# Altium PCB PCB1.PcbDoc
Units mm, origin at the board's own origin, x right, y up, seen from the top; angles counter-clockwise.
Board outline 44.25 x 65.25 mm, 2 copper layers (Top Layer, Bottom Layer), stack 1.671 mm thick; 37 components, 36 nets, 125 pads, 6 vias.
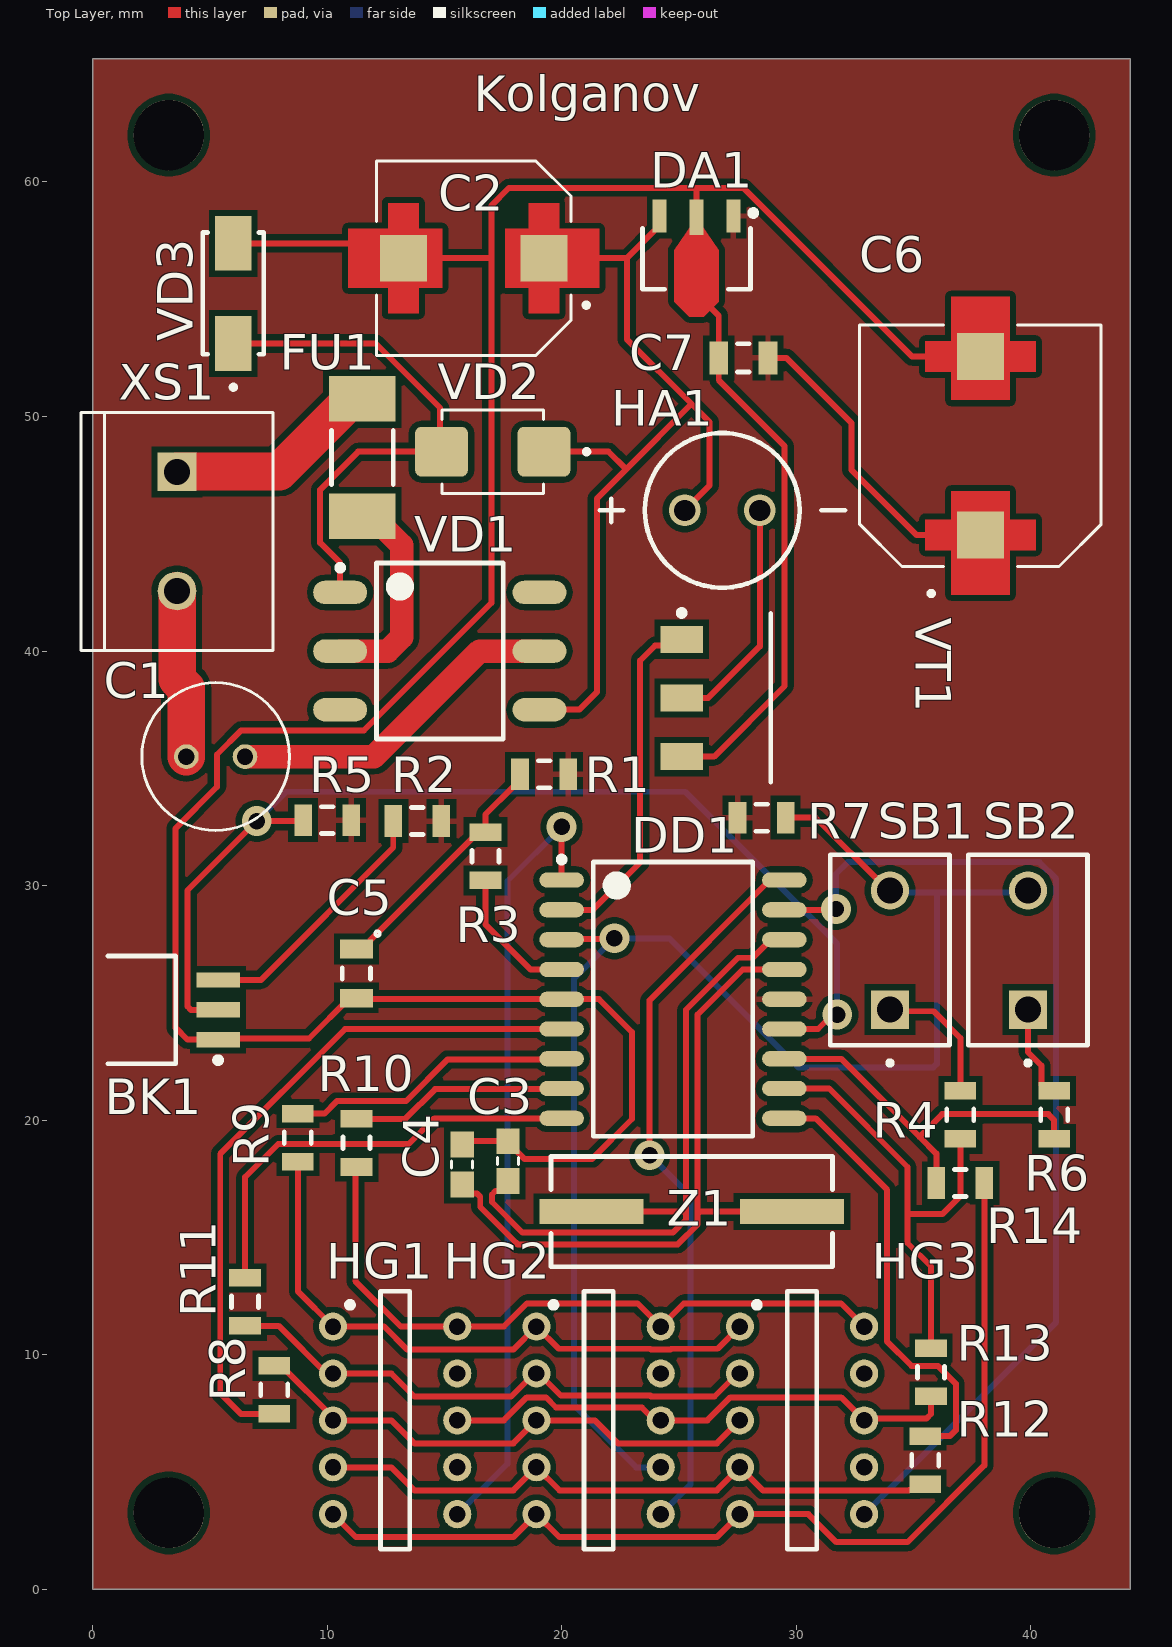
[diagram p0: Top Layer view]
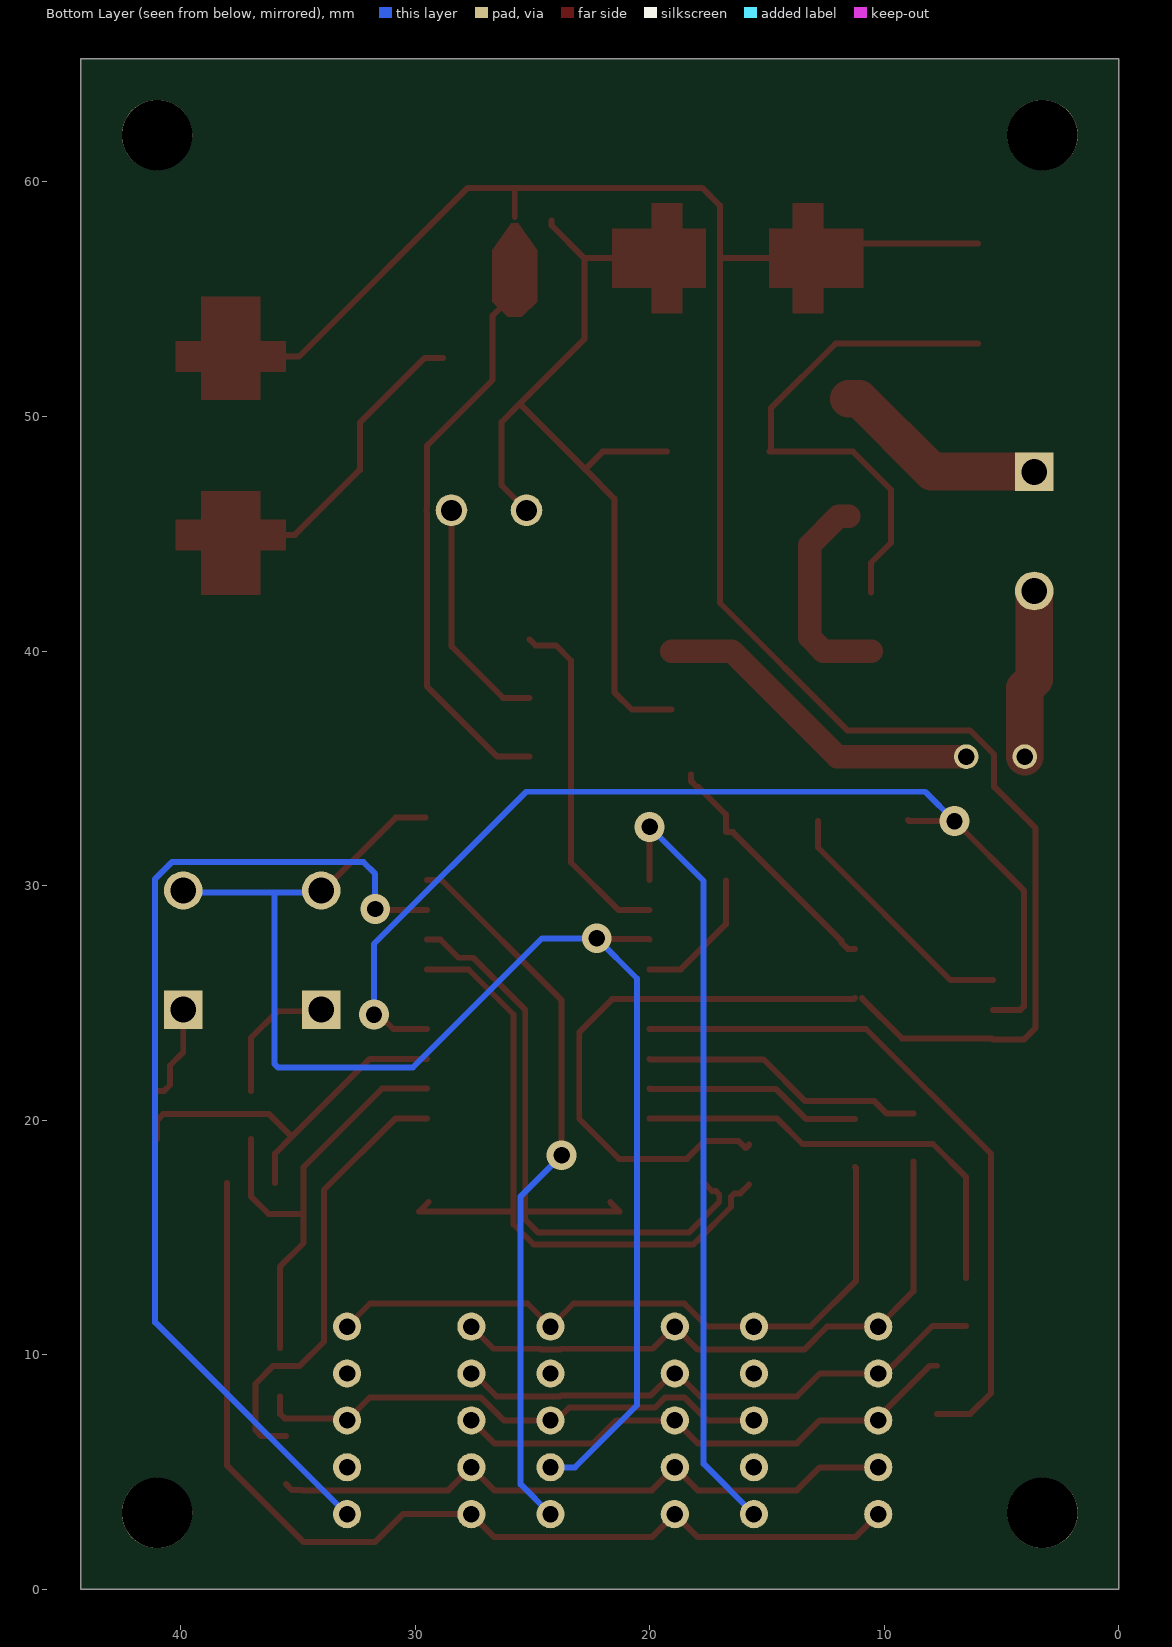
[diagram p1: Bottom Layer view, seen from below]
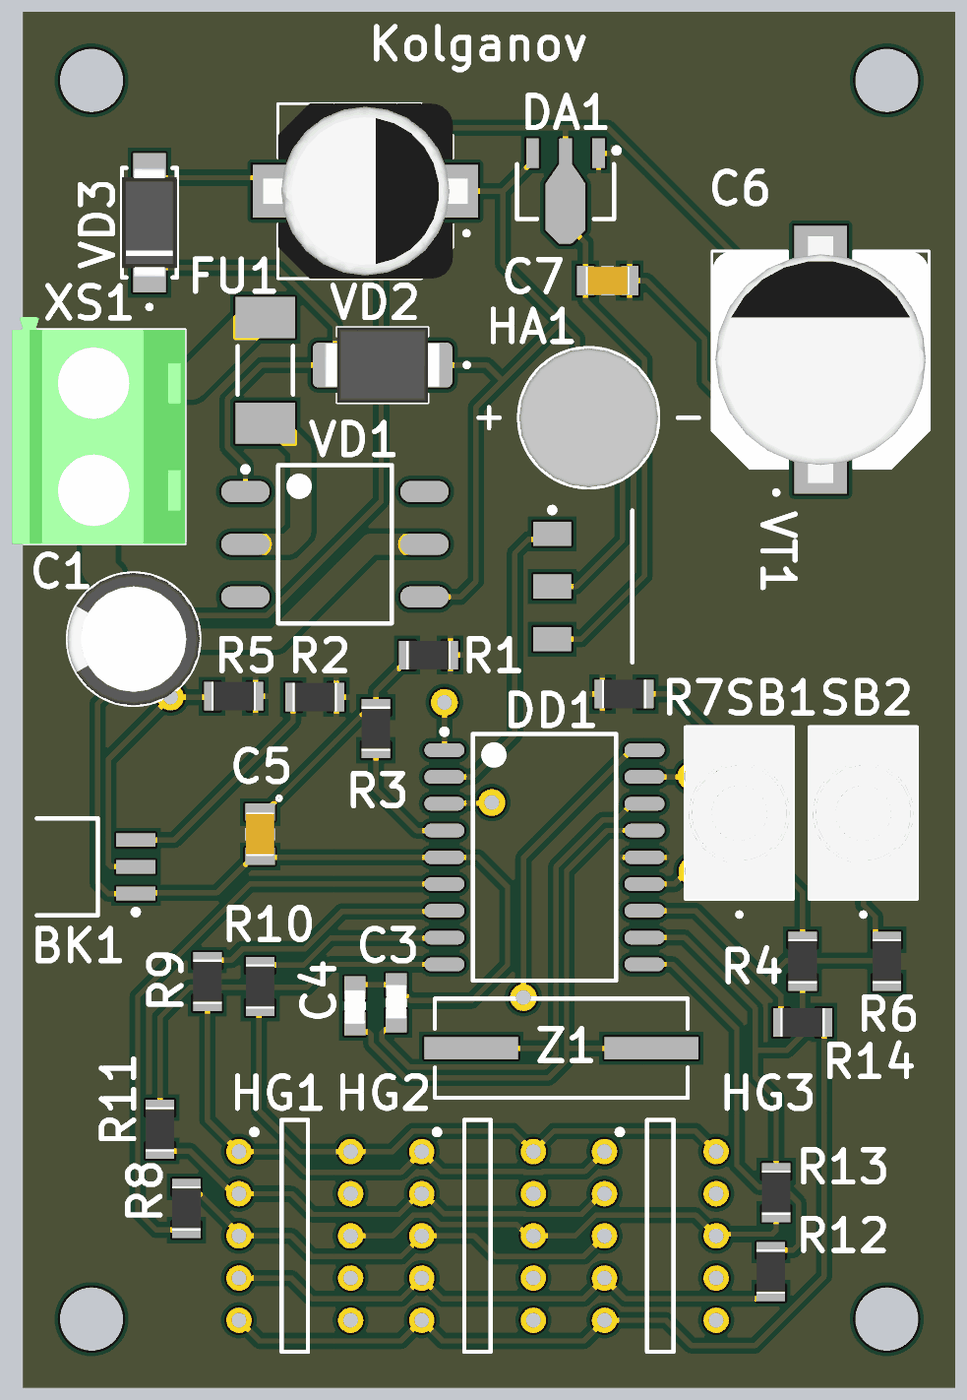
[diagram p2: 3D render of the assembled board from above, using the file's embedded part models]

## Layer stack, top to bottom
Top Solder: solder mask 0.0102, Solder Resist, Dk 3.5
Top Layer: signal copper 0.0356
Dielectric 1: dielectric 1.6, FR-4, Dk 4.8
Bottom Layer: signal copper 0.0356
Bottom Solder: solder mask 0.0102, Solder Resist, Dk 3.5

## Board outline
0,0 0,65.25 44.25,65.25 44.25,0

## Design rules (kind name [scope] priority, off if disabled: settings)
Clearance [All] p1: gap=0.254 ignorepadtopadclearanceinfootprint=FALSE except(0: Arc-Hole Track-Hole SMDPad-Hole THPad-Hole Via-Hole Fill-Hole Poly-Hole Region-Hole Text-Hole; 0.25: Arc-Arc Arc-Track Track-Track)
DiffPairsRouting DiffPair_DiffPairsRouting [InDifferentialPair ('OSC')] p1: maxlimit=0.254 minlimit=0.25 mostfreqgap=0.25 toplayer_minwidth=0.25 toplayer_maxwidth=0.381 toplayer_prefwidth=0.25 bottomlayer_minwidth=0.25 bottomlayer_maxwidth=0.381 bottomlayer_prefwidth=0.25 maxuncoupledlength=12.7
DiffPairsRouting [All] p2: maxlimit=0.254 minlimit=0.254 mostfreqgap=0.254 toplayer_minwidth=0.381 toplayer_maxwidth=0.381 toplayer_prefwidth=0.381 bottomlayer_minwidth=0.381 bottomlayer_maxwidth=0.381 bottomlayer_prefwidth=0.381 maxuncoupledlength=12.7
MatchedLengths DiffPair_MatchedLengths [InDifferentialPair ('OSC')] p1: tolerance=2.5 checknetsindiffpair=FALSE checkdiffpairvsdiffpair=TRUE checkxsignals=TRUE checkothers=TRUE
PolygonConnect [All] p1: connectstyle=Relief reliefconductorwidth=0.254 reliefentries=4 polygonreliefangle="90 Angle" airgapwidth=0.254
RoutingVias [All] p1: holewidth=0.7 width=1.27 viastyle="Through Hole" minholewidth=0.7 minwidth=1.27 maxholewidth=0.7 maxwidth=1.27
SolderMaskExpansion [All] p1: expansion=0.102 istentingtop=FALSE
Width [All] p1: maxlimit=1.6 minlimit=0.25 preferedwidth=0.25 minimp=50.000000 maximp=50.000000 favimp=50.000000
29 further rules are at their usual default settings.

## Classes and differential pairs
differential pair OSC: +OSC_P -OSC_N

## Components (designator, comment, footprint, x,y, rotation, side; value= is the part's Value field where it differs from the comment)
BK1 "DS18B20" "ds18b20 (Temperature)" 2.6,24.7 r180 top
C1 "CapacitorBI" "c1 1uF 400v" 5.25,35.5 r180 top
C2 "CapcatiorPOL" "c2 CAP ALUM 470UF 20% 25V SMD" 16.25,56.75 r180 top
C3 "CapacitorBI" "c3 c4 CAPC1608X90" 17.712,18.25 r90 top
C4 "CapacitorBI" "c3 c4 CAPC1608X90" 15.754,18.105 r270 top
C5 "CapcatiorPOL" "Polar CAPACITOR" 11.25,26.25 r270 top
C6 "CapcatiorPOL" "c6 CAP ALUM 1000UF 20% 16V SMD" 37.858,48.754 r90 top
C7 "CapacitorBI" CAPACITOR 27.75,52.5 r180 top
DA1 "78L05" 78lo5 25.75,56.75 r270 top
DD1 "PIC16F84A" PIC16F84A 24.75,25.154 r0 top
FU1 "Fuse box" "SMD06025C2 (Плавкий предохранитель)" 11.5,48.25 r270 top
HA1 "KCG0603-K" "KCG0603-K Пищалка" 26.849,46 r0 top
HG1 "LSD3C52-20" "LSD3C52-20 (7 segment)" 12.9,7.196 r0 top
HG2 "LSD3C52-20" "LSD3C52-20 (7 segment)" 21.575,7.196 r0 top
HG3 "LSD3C52-20" "LSD3C52-20 (7 segment)" 30.25,7.196 r0 top
R1 "resistor" "RES 0805" 19.25,34.746 r0 top
R2 "resistor" "RES 0805" 13.846,32.75 r180 top
R3 "resistor" "RES 0805" 16.75,31.25 r90 top
R4 "resistor" "RES 0805" 37,20.221 r270 top
R5 "resistor" "RES 0805" 10,32.792 r180 top
R6 "resistor" "RES 0805" 41,20.221 r270 top
R7 "resistor" "RES 0805" 28.525,32.896 r0 top
R8 "resistor" "RES 0805" 7.75,8.5 r270 top
R9 "resistor" "RES 0805" 8.75,19.25 r90 top
R10 "resistor" "RES 0805" 11.25,19.025 r90 top
R11 "resistor" "RES 0805" 6.5,12.25 r90 top
R12 "resistor" "RES 0805" 35.5,5.5 r90 top
R13 "resistor" "RES 0805" 35.75,9.25 r90 top
R14 "resistor" "RES 0805" 37,17.316 r180 top
SB1 "Button" "SW_800AWSP9M2QE (button)" 34,27.25 r90 top
SB2 "Button" "SW_800AWSP9M2QE (button)" 39.884,27.25 r90 top
VD1 "diode bridge" "КЦ407А (Диодный мост)" 14.806,40 r0 top
VD2 "Stabilitron" "Стабилитрон DIOM5436X247N" 17.064,48.5 r180 top
VD3 "Diod" "Диод US1A-13-F" 6,55.25 r90 top
VT1 "transistor" КТ315Б 29.369,38 r0 top
XS1 "Power" "Питание TE_282837-2" 3.6,45.1 r270 top
Z1 "kwarz" "Кварц  hc-49sm" 25.55,16.1 r0 top

## Footprints (in the part's own frame and the unit in brackets; to place one, negate y for a bottom-side part, rotate by r counter-clockwise, add the part's x,y. Pads: shape width x height; smd on the part's side, far side on the other; paste and mask are expansions set on the pad)
78lo5 [mm] "SOT89, 3-Leads, Body 4,50x2,45mm, Pitch 1,57mm, Lead Span 4,1mm, IPC Medium Density"
  rect 1.4x0.6 smd: 1(-1.8,1.57) 3(-1.8,-1.57)
  rect 1.5x0.6 smd: 2(-1.75,0)
  Top Layer region: -1.5,0.154 -0.35,0.95 1.85,0.95 2.5,0.3 2.5,-0.3 1.85,-0.95 -0.35,-0.95 -1.5,-0.154
  silkscreen extent -2.05,-2.3 1.32,2.55, body extent -1.28,-2.3 1.32,2.3, height 1.6
"c1 1uF 400v" [mm] "ECAP (К50-35), 1мкФ, 400В, 105°C, 20%, 6x12мм"
  round 1.05 hole 0.7: 1(1.25,0) 2(-1.25,0)
  silkscreen extent -3.15,-3.15 3.15,3.15, body extent -3.14,-3.14 3.15,3.14, height 12.51
"c2 CAP ALUM 470UF 20% 25V SMD" [mm]
  rect 2x2 smd paste-2 mask+0: 1(-3,0) 2(3,0)
  Top Layer region: 3.65,1.25 5.35,1.25 5.35,-1.25 3.65,-1.25 3.65,-2.35 2.35,-2.35 2.35,-1.25 1.35,-1.25 1.35,1.25 2.35,1.25 2.35,2.35 3.65,2.35
  Top Layer region: -2.35,1.25 -1.35,1.25 -1.35,-1.25 -2.35,-1.25 -2.35,-2.35 -3.65,-2.35 -3.65,-1.25 -5.35,-1.25 -5.35,1.25 -3.65,1.25 -3.65,2.35 -2.35,2.35
  silkscreen extent -4.9,-4.15 4.15,4.15, body extent -4.85,-4.15 4.85,4.15, height 10.5
"c3 c4 CAPC1608X90" [mm] "22 µF Molded Tantalum Capacitors 5 V 0603 (1608 Metric) 7.5Ohm"
  rect 1.1x1 smd: 1(-0.85,0) 2(0.85,0)
  silkscreen extent -0.15,-0.45 0.15,0.45, body extent -0.75,-0.5 0.85,0.5, height 0.85
"c6 CAP ALUM 1000UF 20% 16V SMD" [mm]
  rect 2x2 smd paste-2 mask+0: 1(-3.8,0) 2(3.8,0)
  Top Layer region: -3.15,1.25 -1.95,1.25 -1.95,-1.25 -3.15,-1.25 -3.15,-2.35 -4.45,-2.35 -4.45,-1.25 -6.35,-1.25 -6.35,1.25 -4.45,1.25 -4.45,2.35 -3.15,2.35
  Top Layer region: 4.45,1.25 6.35,1.25 6.35,-1.25 4.45,-1.25 4.45,-2.35 3.15,-2.35 3.15,-1.25 1.95,-1.25 1.95,1.25 3.15,1.25 3.15,2.35 4.45,2.35
  silkscreen extent -6.4,-5.15 5.15,5.15, body extent -5.85,-5.15 5.85,5.15, height 10.51
CAPACITOR [mm] "Chip Capacitor, 2-Leads, Body 2,00x1,25mm, IPC Medium Density"
  rect 0.8x1.4 smd: 1(-1.05,0) 2(1.05,0)
  silkscreen extent -0.25,-0.6 0.25,0.6, body extent -1.05,-0.67 1.05,0.67, height 0.45
"ds18b20 (Temperature)" [mm]
  rect 1.85x0.65 smd: 1(-2.75,1.27) 2(-2.75,0) 3(-2.75,-1.27)
  silkscreen extent -2.87,-2.3 1.95,2.3, body extent -0.95,-2.3 3.63,2.3, height 3.68
"KCG0603-K Пищалка" [mm]
  round 1.35 hole 0.9: 1(-1.6,0) 2(1.6,0)
  silkscreen extent -5.23,-3.3 5.23,3.3, body extent -3.3,-3.3 3.3,3.3, height 3.41
"LSD3C52-20 (7 segment)" [mm]
  round 1.2 hole 0.7: 1(-2.65,4) 2(-2.65,2) 3(-2.65,0) 4(-2.65,-2) 5(-2.65,-4) 6(2.65,-4) 7(2.65,-2) 8(2.65,0) 9(2.65,2) 10(2.65,4)
  silkscreen extent -2.05,-5.5 0.63,5.5, body extent -3.5,-5.5 3.5,5.5, height 6
PIC16F84A [mm] "SOIC, 18-Leads, Body 11,53x7,49mm, Pitch 1,27mm, IPC Medium Density"
  oval 1.9x0.65 smd: 1(-4.75,5.08) 2(-4.75,3.81) 3(-4.75,2.54) 4(-4.75,1.27) 5(-4.75,0) 6(-4.75,-1.27) 7(-4.75,-2.54) 8(-4.75,-3.81) 9(-4.75,-5.08) 10(4.75,-5.08) 11(4.75,-3.81) 12(4.75,-2.54) 13(4.75,-1.27) 14(4.75,0) 15(4.75,1.27) 16(4.75,2.54) 17(4.75,3.81) 18(4.75,5.08)
  silkscreen extent -4.87,-5.85 3.4,6.08, body extent -3.8,-5.85 3.8,5.85, height 2.64
"Polar CAPACITOR" [mm] "Chip Capacitor, 2-Leads, Body 2,00x1,25mm, IPC Medium Density"
  rect 0.8x1.4 smd: 1(-1.05,0) 2(1.05,0)
  silkscreen extent -1.8,-0.6 0.25,1, body extent -1.05,-0.67 1.05,0.67, height 0.45
"RES 0805" [mm] "Chip Resistor, 2-Leads, Body 2,00x1,25mm, IPC Medium Density"
  rect 0.75x1.35 smd: 1(-1.025,0) 2(1.025,0)
  silkscreen extent -0.25,-0.58 0.25,0.58, body extent -1.05,-0.67 1.05,0.67, height 0.45
"SMD06025C2 (Плавкий предохранитель)" [mm]
  rect 1.95x2.83 smd: 1(-2.505,0) 2(2.505,0)
  silkscreen extent -1.15,-1.31 1.15,1.32, body extent -3.05,-1.34 3.05,1.35, height 2.69
"SW_800AWSP9M2QE (button)" [mm]
  rect 1.635x1.635 / inner round 1.635 / far side rect 1.635x1.635 hole 1.1: 1(-2.54,0)
  round 1.635 hole 1.1: 2(2.54,0)
  silkscreen extent -4.91,-2.54 4.07,2.54, body extent -4.07,-2.54 4.07,2.54, height 18.85
"Диод US1A-13-F" [mm] "Diode Standard 50 V 1A Surface Mount SMA"
  rect 2.33x1.55 smd: 1(2.135,0) 2(-2.135,0)
  silkscreen extent -4.1,-1.3 2.6,1.3, body extent -2.6,-1.3 2.6,1.3, height 2.41
"Кварц  hc-49sm" [mm] "4.000 МГц HC-49SM, Кварцевый резонатор"
  rect 4.45x1.05 smd: 1(-4.275,0) 2(4.275,0)
  silkscreen extent -6,-2.35 6,2.35, body extent -6,-2.35 6,2.35, height 5
КТ315Б [mm] "TO, 4-Pads, Body 5,60x6,96mm (max), IPC Medium Density"
  rect 1.8x1.15 smd: 1(-4.25,2.5) 2(-4.25,0) 3(-4.25,-2.5)
  silkscreen extent -4.37,-3.6 -0.45,3.75, body extent 0.2,-3.6 5.2,3.6, height 3
"КЦ407А (Диодный мост)" [mm] "CFP, 6-Leads, Body 7,50x6,00mm (max), Pitch 2,50mm, IPC Medium Density"
  oval 2.3x1 smd: 1(-4.25,2.5) 2(-4.25,0) 3(-4.25,-2.5) 4(4.25,-2.5) 5(4.25,0) 6(4.25,2.5)
  silkscreen extent -4.37,-3.75 2.7,3.75, body extent -3,-3.75 3,3.75, height 3
"Питание TE_282837-2" [mm] "282837-2 Connector Terminal Blocks Receptacle 2 Position 5.08mm Solder Straight Thru-Hole 13.5A/Contact"
  rect 1.65x1.65 / inner round 1.65 / far side rect 1.65x1.65 hole 1.1: 1(-2.54,0)
  round 1.65 hole 1.1: 2(2.54,0)
  silkscreen extent -5.08,-4.1 5.08,4.1, body extent -5.68,-4.1 5.08,4.1, height 10
"Стабилитрон DIOM5436X247N" [mm] "Zener Diode 15 V 3 W ±5% Surface Mount SMB"
  rrect25% 2.25x2.12 smd: 1(2.185,0) 2(-2.185,0)
  silkscreen extent -4.1,-1.78 2.16,1.78, body extent -2.72,-1.78 2.72,1.78, height 2.48

## Free pads (board coordinates)
  round 3 hole 3 unplated: ""(3.25,3.25) ""(3.25,62) ""(41,3.25) ""(41,62)

## Via types
v1: diameter 1.27, hole 0.7, Top Layer to Bottom Layer, 6 vias

## Nets (pads, with @x,y where several pads share a name; then routed paths per layer and width w, separated by ;. In a path a pad name is that pad's centre, name@x,y a point inside that pad or via, vN(x,y) a via of type N, cw(c..) or ccw(c..) an arc to the next point about the centre after c; other vN are vias at no path point)
a: HG1.1 HG2.1 HG3.1 R9.1 | length 26.6
  Top Layer w0.254: R9.1 8.75,12.696 HG1.1 12.43,11.196 13.411,10.215 17.944,10.215 HG2.1 19.871,10.25 23.783,10.25 23.819,10.215 24.631,10.215 24.667,10.25 26.654,10.25 HG3.1
b: HG1.10 HG2.10 HG3.10 R10.1 | length 29
  Top Layer w0.254: R10.1 11.204,17.954 11.204,13.134 13.143,11.196 HG1.10 17.538,11.196 18.519,12.177 23.244,12.177 HG2.10 25.206,12.177 31.919,12.177 HG3.10
c: HG1.8 HG2.8 HG3.8 R13.1 | length 22.7
  Top Layer w0.254: HG1.8 17.538,7.196 18.519,8.177 19.331,8.177 19.762,7.746 23.419,7.746 23.969,7.196 HG2.8 26.213,7.196 27.194,8.177 31.919,8.177 HG3.8 32.985,7.281 35.562,7.281 35.75,7.469 R13.1
d: HG1.5 HG2.5 HG3.5 R14.1 | length 43.3
  Top Layer w0.254: HG1.5 11.231,2.215 17.944,2.215 HG2.5 19.906,2.215 26.619,2.215 HG3.5 30.52,3.196 31.716,2 34.75,2 38.025,5.275 R14.1
e: HG1.4 HG2.4 HG3.4 R12.1 | length 27.4
  Top Layer w0.254: HG1.4 12.741,5.196 13.722,4.215 17.944,4.215 HG2.4 19.906,4.215 26.619,4.215 HG3.4 28.581,4.215 34.803,4.215 34.815,4.227 35.252,4.227 R12.1
f: HG1.2 HG2.2 HG3.2 R11.1 | length 23.6
  Top Layer w0.254: R11.1 7.935,11.225 10.035,9.124 10.107,9.196 HG1.2 12.741,9.196 13.722,8.215 17.844,8.215 18.825,9.196 19.025,9.196 19.971,8.25 23.783,8.25 23.819,8.215 26.519,8.215 27.5,9.196 HG3.2
g: HG1.3 HG2.3 HG3.3 R8.1 | length 22.5
  Top Layer w0.254: R8.1 8.05,9.525 10.25,7.325 HG1.3 12.741,7.196 13.722,6.215 17.944,6.215 HG2.3 21.416,7.196 22.397,6.215 26.619,6.215 HG3.3
NetBK1_1: BK1.1 C2.2 C3.2 C4.1 C5.2 C6.2 C7.2 DA1.2 DD1.5 VD3.1 VT1.3 | length 137.5
  Top Layer w0.254: VD3.1 12.615,57.385 C2.2 17,56.75 ; C5.2@10.95,25.2 9.23,23.48 5.4,23.48 BK1.1 4.044,23.43 3.54,23.934 3.54,32.44 5.306,34.206 5.306,35.587 6.338,36.619 11.571,36.619 17,42.048 17,56.75 ; C5.2 11.296,25.154 DD1.5 21.596,25.154 23,23.75 23,20.047 21.303,18.35 18.412,18.35 17.712,19.05 C3.2 16.2,19.1 15.904,18.804 C4.1 ; VT1.3 26.5,35.5 29.5,38.5 29.5,45.902 ccw(c28.449,46) 29.5,46.098 29.5,48.75 29.426,48.824 26.7,51.55 C7.2 26.7,54.3 25.5,55.5 ; DA1.2 25.75,59.713 25.713,59.75 ; C6.2 34.947,52.554 27.751,59.75 25.713,59.75 ; 17,56.75 17,58.993 17.757,59.75 25.713,59.75
NetBK1_2: BK1.2 DD1.13 R5.2 | length 46
  Top Layer w0.254: BK1.2 4.193,24.7 4.044,24.849 4.044,29.794 v1(7,32.75) 8.933,32.75 R5.2 ; DD1.13 30.929,23.884 31.545,24.5 v1(31.75,24.5)
  Bottom Layer w0.254: v1(7,32.75) 8.25,34 25.263,34 31.75,27.513 v1(31.75,24.5)
NetBK1_3: BK1.3 R2.2 | length 10.9
  Top Layer w0.254: BK1.3 7.17,25.97 12.821,31.621 R2.2
NetC1_1: C1.1 XS1.2 | length 7.2
  Top Layer w1.6: XS1.2 3.6,38.803 4,38.403 C1.1
NetC1_2: C1.2 VD1.5 | length 14.4
  Top Layer w1: C1.2 12,35.5 16.5,40 VD1.5
NetC2_1: C2.1 DA1.3 HA1.1 VD1.4 VD2.2 | length 38.9
  Top Layer w0.254: VD1.4 20.75,37.5 21.5,38.25 21.5,46.5 22.75,47.75 ; VD2.2 22,48.5 22.75,47.75 ; C2.1 20.981,56.75 22.78,56.75 ; DA1.3@24.18,58.361 24.18,58.15 22.78,56.75 ; HA1.1 26.312,47.064 26.312,49.762 25.537,50.537 ; 22.75,47.75 25.537,50.537 ; 22.78,56.75 22.78,53.294 25.537,50.537
NetC5_1: C5.1 R1.1 R3.2 | length 10.7
  Top Layer w0.254: C5.1 11.55,27.3 11.823,27.573 11.823,27.648 16.45,32.275 R3.2 16.75,33.031 17.917,34.198 17.977,34.198 18.225,34.446 R1.1
NetDD1_1: DD1.1 HG1.6 | length 33.4
  Top Layer w0.254: DD1.1 v1(20,32.5)
  Bottom Layer w0.254: HG1.6 17.694,5.34 17.694,30.194 v1(20,32.5)
NetDD1_2: DD1.2 VT1.1 | length 14.9
  Top Layer w0.254: DD1.2 21.331,28.964 23.349,30.983 23.349,39.599 23.987,40.237 24.855,40.237 VT1.1
NetDD1_3: DD1.3 HG2.7 R7.2 SB1.2 SB2.2 | length 62.8
  Top Layer w0.254: DD1.3 20.028,27.722 22.222,27.722 v1(22.25,27.75) ; R7.2 30.825,32.896 33.794,29.926 SB1.2@33.794,29.721
  Bottom Layer w0.254: HG2.7 23.179,5.196 20.534,7.84 20.534,26.034 v1(22.25,27.75) 24.59,27.75 30.09,22.25 35.851,22.25 36,22.399 36,29.713 ; SB1.2@33.802,29.713 36,29.713 ; SB2.2@39.884,29.705 39.876,29.713 36,29.713
NetDD1_4: DD1.4 R3.1 | length 5.9
  Top Layer w0.254: R3.1 16.75,28.343 18.669,26.424 DD1.4
NetDD1_6: DD1.6 R8.2 | length 29.6
  Top Layer w0.254: R8.2 6.323,7.475 5.444,8.354 5.444,18.558 10.77,23.884 DD1.6
NetDD1_7: DD1.7 R9.2 | length 12.2
  Top Layer w0.254: R9.2 9.886,20.275 10.417,20.806 13.362,20.806 15.143,22.587 19.973,22.587 DD1.7
NetDD1_8: DD1.8 R10.2 | length 9.3
  Top Layer w0.254: R10.2 13.337,20.05 14.604,21.317 19.973,21.317 DD1.8
NetDD1_9: DD1.9 R11.2 | length 18.8
  Top Layer w0.254: R11.2 6.5,17.564 7.917,18.981 13.481,18.981 14.574,20.074 DD1.9
NetDD1_10: DD1.10 R12.2 | length 19.2
  Top Layer w0.254: DD1.10 30.831,20.074 33.881,17.024 33.881,10.555 34.917,9.519 36.045,9.519 36.806,8.758 36.806,6.775 36.556,6.525 R12.2
NetDD1_11: DD1.11 R4.2 R13.2 | length 19.8
  Top Layer w0.254: DD1.11 31.406,21.344 34.75,18 34.75,16 ; R13.2 35.75,13.762 34.75,14.762 34.75,16 ; R4.2 37,16.753 36.247,16 34.75,16
NetDD1_12: DD1.12 R6.2 R14.2 | length 16.5
  Top Layer w0.254: DD1.12 29.75,22.614 31.927,22.614 35.258,19.283 ; R14.2 35.975,18.566 35.258,19.283 ; R6.2 41,20 40.75,20.25 36.225,20.25 35.258,19.283
NetDD1_17: DD1.17 HG3.6 | length 44.1
  Top Layer w0.254: DD1.17 31.664,28.964 v1(31.7,29)
  Bottom Layer w0.254: v1(31.7,29) 31.7,30.5 32.2,31 40.369,31 41.083,30.286 41.083,11.379 HG3.6
NetDD1_18: DD1.18 HG2.6 | length 31
  Top Layer w0.254: v1(23.75,18.5) 23.75,25.109 28.875,30.234 DD1.18
  Bottom Layer w0.254: v1(23.75,18.5) 25.5,16.75 25.5,4.471 HG2.6
NetFU1_1: FU1.1 XS1.1 | length 9.2
  Top Layer w1.6: XS1.1 3.616,47.656 7.961,47.656 11.06,50.755 FU1.1
NetFU1_2: FU1.2 VD1.2 | length 9
  Top Layer w1: VD1.2 12.59,40 13.176,40.586 13.176,44.509 11.94,45.745 FU1.2
NetHA1_2: HA1.2 VT1.2 | length 10
  Top Layer w0.254: VT1.2 VT1.2 26.251,38.001 28.449,40.199 HA1.2
NetR4_1: R4.1 SB1.1 | length 5.9
  Top Layer w0.254: SB1.1@33.794,24.641 35.859,24.641 37,23.5 R4.1
NetR6_1: R6.1 SB2.1 | length 4
  Top Layer w0.254: SB2.1@39.884,24.625 39.884,22.895 40.452,22.327 40.452,21.494 40.7,21.246 R6.1
NetVD1_1: VD1.1 VD2.1 VD3.2 | length 22.4
  Top Layer w0.254: VD3.2 12.069,53.115 14.814,50.37 VD2.1@14.814,48.5 ; VD1.1 10.556,43.76 9.704,44.612 9.704,46.878 11.326,48.5 VD2.1@14.814,48.5 ; VD2.1 VD2.1@14.814,48.5
OSC_N: C4.2 DD1.15 Z1.2 | length 29.8
  Top Layer w0.25: C4.2 15.754,17.25 16.129,16.875 16.381,16.875 16.528,16.729 16.528,16.297 17.905,14.92 18.125,14.7 24.743,14.7 24.95,14.7 25.8,15.55 25.8,16 ; Z1.2@29.425,16.5 Z1.2 25.9,16.1 25.8,16 ; DD1.15 27.724,26.424 25.8,24.5 25.8,16.1 25.8,16
OSC_P: C3.1 DD1.16 Z1.1 | length 29.3
  Top Layer w0.25: C3.1 17.712,17.35 17.337,16.975 17.174,16.975 17.028,16.829 17.028,16.504 18.332,15.2 24.743,15.2 25.3,15.757 25.3,16 ; Z1.1@21.675,16.5 Z1.1 25.2,16.1 25.3,16 ; DD1.16 28.914,27.694 28.144,26.924 27.517,26.924 25.3,24.707 25.3,16.1 25.3,16
VCC: C6.1 C7.1 DA1.1 DD1.14 R1.2 R2.1 R5.1 R7.1 | length 13.4
  Top Layer w0.254: C7.1 29.581,52.5 32.354,49.727 32.354,47.727 35.127,44.954 C6.1
pads on no net: HG1.7 HG1.9 HG2.9 HG3.7 HG3.9 VD1.3 VD1.6

## Polygon pours and split planes (outlines as drawn)
VCC on Top Layer "VCC_L01_P000" (solid, pour order 0): 0,65.25 44.25,65.25 44.25,0 0,0

## Silkscreen, mask and mechanical layers (free items; w line width, h text height)
Top Overlay:
  text "Kolganov" at 16.254,63.012 h1.52
Mechanical 1:
  the board outline again, w0.254